# Altium PCB PCB_layout.PcbDoc
Units mm, origin at the board's own origin, x right, y up, seen from the top; angles counter-clockwise.
Board outline 55 x 40 mm, 2 copper layers (Top Layer, Bottom Layer); 84 components, 11 nets, 184 pads, 16 vias.
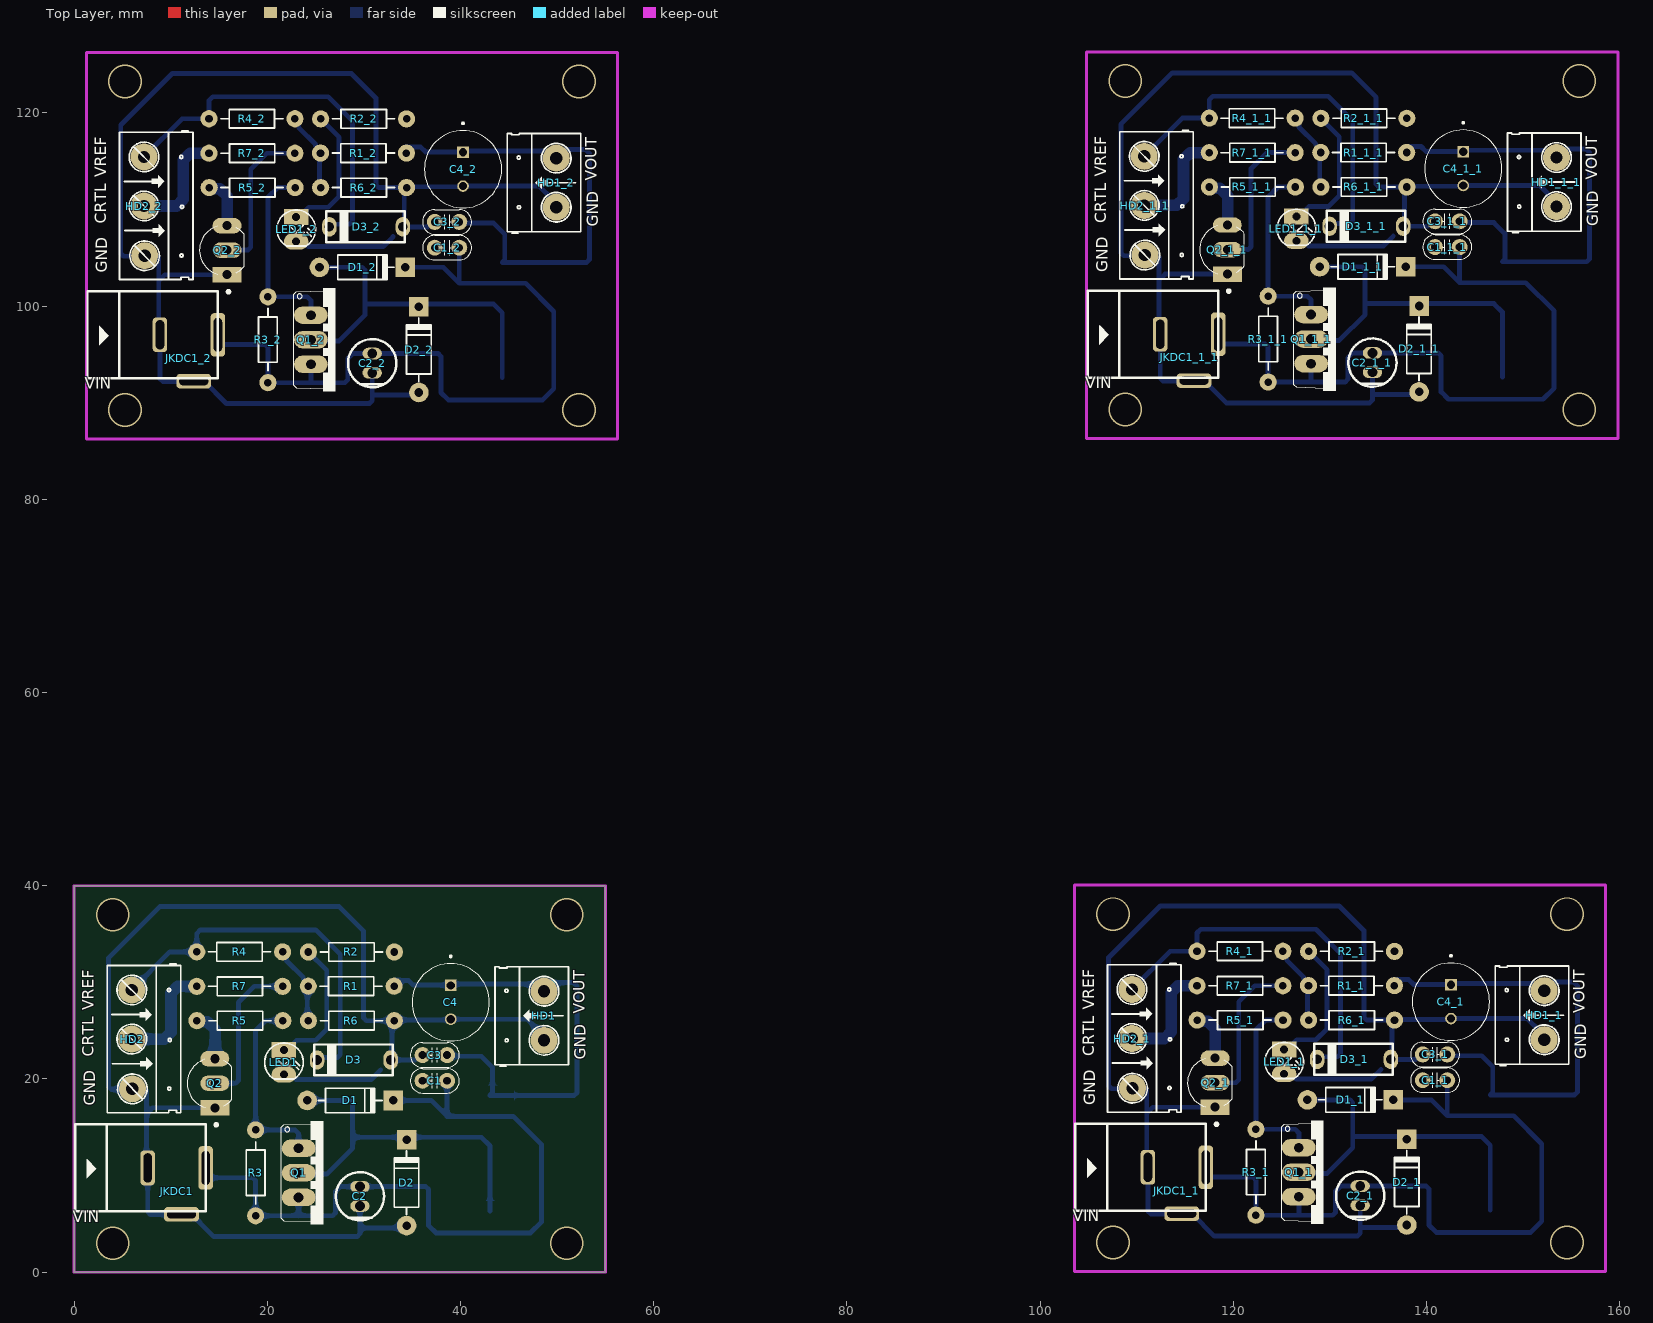
[diagram p0: Top Layer view]
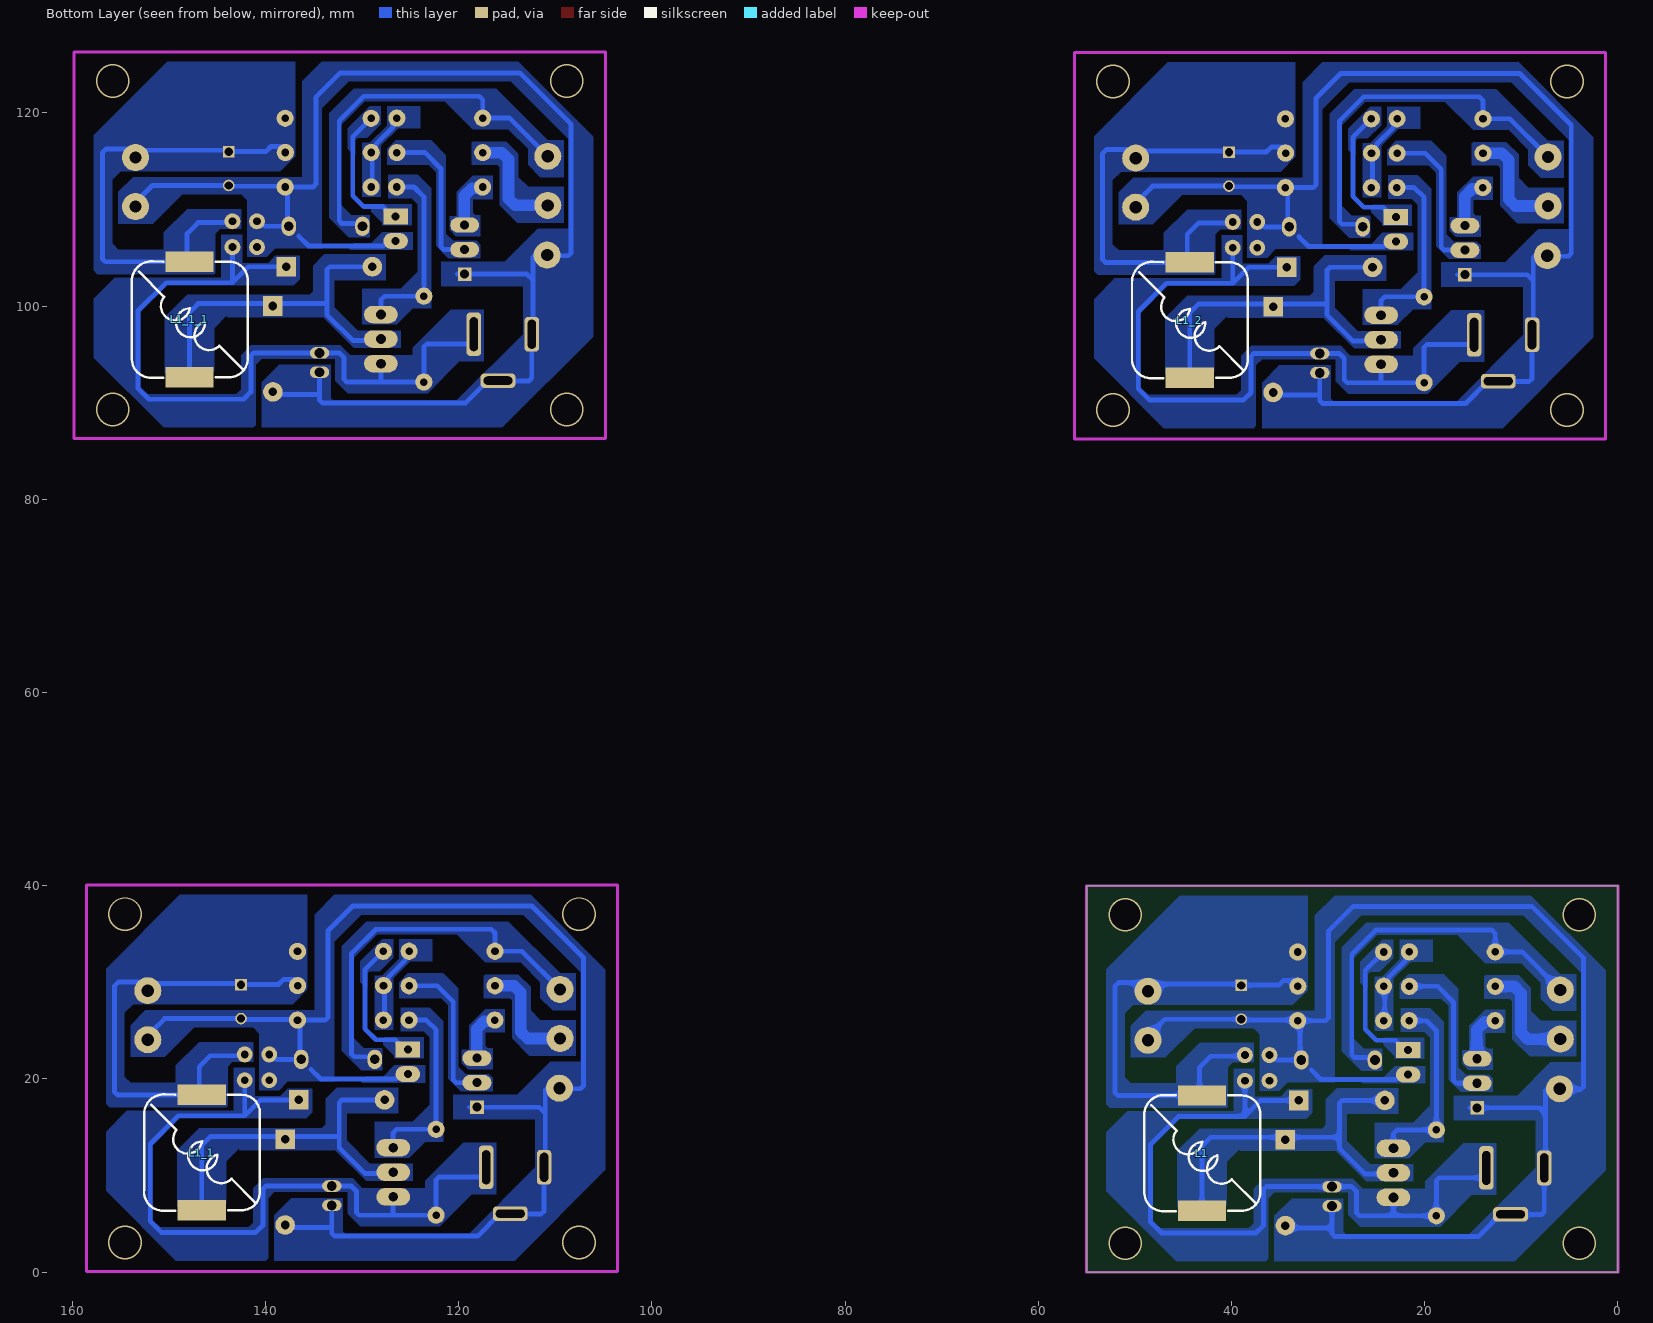
[diagram p1: Bottom Layer view, seen from below]

## Layer stack, top to bottom
Top Solder: solder mask 0.0102, Solder Resist, Dk 3.5
Top Layer: signal copper 0.0356
Dielectric 1: dielectric 0.32, FR-4, Dk 4.8
Bottom Layer: signal copper 0.0356
Bottom Solder: solder mask 0.0102, Solder Resist, Dk 3.5

## Board outline
0,0 55,0 55,40 0,40

## Design rules (kind name [scope] priority, off if disabled: settings)
Clearance [All] p1: gap=0.254 ignorepadtopadclearanceinfootprint=TRUE except(0: Arc-Hole Track-Hole SMDPad-Hole THPad-Hole Via-Hole Fill-Hole Poly-Hole Region-Hole Text-Hole)
HoleSize [All] p1: absolutevalues=TRUE maxlimit=1000 minlimit=0.3 maxpercent=80.000 minpercent=20.000
HoleToHoleClearance [All] p1 off: gap=0.254 allowstackedmicrovias=TRUE
PlaneClearance [All] p1: clearance=5
PolygonConnect [All] p1: connectstyle=Direct reliefconductorwidth=0.5 reliefentries=4 polygonreliefangle="90 Angle" airgapwidth=0.5
RoutingVias [All] p1: holewidth=0.4 width=0.6 viastyle="Through Hole" minholewidth=0.4 minwidth=0.6 maxholewidth=1000 maxwidth=1000
SilkToSilkClearance [All] p1 off: silktosilkclearance=0.254
SilkToSolderMaskClearance [IsPad] p1 off: minsilkscreentomaskgap=0.254 clearancetoexposedcopper=TRUE
SolderMaskExpansion [All] p1: expansion=0.102 istentingtop=FALSE
Width [All] p1: maxlimit=1000 minlimit=0.4 preferedwidth=0.5
25 further rules are at their usual default settings.

## Classes and differential pairs
component class schematic: C1 C2 C3 C4 D1 D2 D3 HD1 HD2 JKDC1 L1 LED1 Q1 Q2 R1 R3 R6 R7

## Components (designator, comment, footprint, x,y, rotation, side; value= is the part's Value field where it differs from the comment)
C1 "104" CAP_NP_100 37.338,19.812 r0 top
C1_1 "104" CAP_NP_100 140.87,19.874 r0 top (schematic designator C1)
C1_1_1 "104" CAP_NP_100 142.14,106.107 r0 top (schematic designator C1)
C1_2 "104" CAP_NP_100 38.608,106.045 r0 top (schematic designator C1)
C2 "470uF" "CAP_100uF_16V - duplicate" 29.591,8.858 r270 top
C2_1 "470uF" "CAP_100uF_16V - duplicate" 133.123,8.92 r270 top (schematic designator C2)
C2_1_1 "470uF" "CAP_100uF_16V - duplicate" 134.393,95.153 r270 top (schematic designator C2)
C2_2 "470uF" "CAP_100uF_16V - duplicate" 30.861,95.091 r270 top (schematic designator C2)
C3 "104" CAP_NP_100 37.338,22.479 r0 top
C3_1 "104" CAP_NP_100 140.87,22.541 r0 top (schematic designator C3)
C3_1_1 "104" CAP_NP_100 142.14,108.774 r0 top (schematic designator C3)
C3_2 "104" CAP_NP_100 38.608,108.712 r0 top (schematic designator C3)
C4 "22uF" CAPPRD350W60D800H1150 38.989,27.94 r270 top
C4_1 "22uF" CAPPRD350W60D800H1150 142.521,28.002 r270 top (schematic designator C4)
C4_1_1 "22uF" CAPPRD350W60D800H1150 143.791,114.235 r270 top (schematic designator C4)
C4_2 "22uF" CAPPRD350W60D800H1150 40.259,114.173 r270 top (schematic designator C4)
D1 "MBRS340T3" D1A 24.13,17.78 r180 top value=1N4007
D1_1 "MBRS340T3" D1A 127.662,17.842 r180 top value=1N4007 (schematic designator D1)
D1_1_1 "MBRS340T3" D1A 128.932,104.075 r180 top value=1N4007 (schematic designator D1)
D1_2 "MBRS340T3" D1A 25.4,104.013 r180 top value=1N4007 (schematic designator D1)
D2 "MBRS340T3" D1A 34.417,4.826 r270 top value=1N4007
D2_1 "MBRS340T3" D1A 137.949,4.888 r270 top value=1N4007 (schematic designator D2)
D2_1_1 "MBRS340T3" D1A 139.219,91.121 r270 top value=1N4007 (schematic designator D2)
D2_2 "MBRS340T3" D1A 35.687,91.059 r270 top value=1N4007 (schematic designator D2)
D3 "Diode" Diode_zener 32.766,21.971 r180 top value=1N5007
D3_1 "Diode" Diode_zener 136.298,22.033 r180 top value=1N5007 (schematic designator D3)
D3_1_1 "Diode" Diode_zener 137.568,108.266 r180 top value=1N5007 (schematic designator D3)
D3_2 "Diode" Diode_zener 34.036,108.204 r180 top value=1N5007 (schematic designator D3)
HD1 "Header 2" HED2 48.641,24.003 r90 top
HD1_1 "Header 2" HED2 152.173,24.065 r90 top (schematic designator HD1)
HD1_1_1 "Header 2" HED2 153.443,110.298 r90 top (schematic designator HD1)
HD1_2 "Header 2" HED2 49.911,110.236 r90 top (schematic designator HD1)
HD2 "Header 3" HED3 5.969,29.21 r270 top
HD2_1 "Header 3" HED3 109.501,29.272 r270 top (schematic designator HD2)
HD2_1_1 "Header 3" HED3 110.771,115.505 r270 top (schematic designator HD2)
HD2_2 "Header 3" HED3 7.239,115.443 r270 top (schematic designator HD2)
JKDC1 "JACK DC PAD_2" Jack_DC 13.62,10.795 r0 top
JKDC1_1 "JACK DC PAD_2" Jack_DC 117.152,10.857 r0 top (schematic designator JKDC1)
JKDC1_1_1 "JACK DC PAD_2" Jack_DC 118.422,97.09 r0 top (schematic designator JKDC1)
JKDC1_2 "JACK DC PAD_2" Jack_DC 14.89,97.028 r0 top (schematic designator JKDC1)
L1 "56uH" L_SMD_33uH_4.2A 43.033,6.295 r90 bottom value="150 mH"
L1_1 "56uH" L_SMD_33uH_4.2A 146.565,6.356 r90 bottom value="150 mH" (schematic designator L1)
L1_1_1 "56uH" L_SMD_33uH_4.2A 147.835,92.589 r90 bottom value="150 mH" (schematic designator L1)
L1_2 "56uH" L_SMD_33uH_4.2A 44.303,92.528 r90 bottom value="150 mH" (schematic designator L1)
LED1 "LED" LED-3 21.717,22.987 r270 top value="LED 3 ly Single Colour"
LED1_1 "LED" LED-3 125.249,23.049 r270 top value="LED 3 ly Single Colour" (schematic designator LED1)
LED1_1_1 "LED" LED-3 126.519,109.282 r270 top value="LED 3 ly Single Colour" (schematic designator LED1)
LED1_2 "LED" LED-3 22.987,109.22 r270 top value="LED 3 ly Single Colour" (schematic designator LED1)
Q1 "IRF9Z34N" TO220V 25.781,10.287 r270 top
Q1_1 "IRF9Z34N" TO220V 129.313,10.349 r270 top (schematic designator Q1)
Q1_1_1 "IRF9Z34N" TO220V 130.583,96.582 r270 top (schematic designator Q1)
Q1_2 "IRF9Z34N" TO220V 27.051,96.52 r270 top (schematic designator Q1)
Q2 "2N3904TF" TO92254P520H877-3 13.716,19.558 r90 top
Q2_1 "2N3904TF" TO92254P520H877-3 117.248,19.62 r90 top (schematic designator Q2)
Q2_1_1 "2N3904TF" TO92254P520H877-3 118.518,105.853 r90 top (schematic designator Q2)
Q2_2 "2N3904TF" TO92254P520H877-3 14.986,105.791 r90 top (schematic designator Q2)
R1 "Res1" R1/4W 33.132,29.603 r180 top value=3.3K
R1_1 "Res1" R1/4W 136.664,29.665 r180 top value=3.3K (schematic designator R1)
R1_1_1 "Res1" R1/4W 137.934,115.898 r180 top value=3.3K (schematic designator R1)
R1_2 "Res1" R1/4W 34.402,115.836 r180 top value=3.3K (schematic designator R1)
R2 "Res1" R1/4W 24.257,33.147 r0 top value=1K
R2_1 "Res1" R1/4W 127.789,33.209 r0 top value=1K (schematic designator R2)
R2_1_1 "Res1" R1/4W 129.059,119.442 r0 top value=1K (schematic designator R2)
R2_2 "Res1" R1/4W 25.527,119.38 r0 top value=1K (schematic designator R2)
R3 "Res1" R1/4W 18.796,5.842 r90 top value=10K
R3_1 "Res1" R1/4W 122.328,5.904 r90 top value=10K (schematic designator R3)
R3_1_1 "Res1" R1/4W 123.598,92.137 r90 top value=10K (schematic designator R3)
R3_2 "Res1" R1/4W 20.066,92.075 r90 top value=10K (schematic designator R3)
R4 "Res1" R1/4W 21.59,33.159 r180 top value=100
R4_1 "Res1" R1/4W 125.122,33.221 r180 top value=100 (schematic designator R4)
R4_1_1 "Res1" R1/4W 126.392,119.454 r180 top value=100 (schematic designator R4)
R4_2 "Res1" R1/4W 22.86,119.392 r180 top value=100 (schematic designator R4)
R5 "Res1" R1/4W 12.715,26.035 r0 top value=10K
R5_1 "Res1" R1/4W 116.247,26.097 r0 top value=10K (schematic designator R5)
R5_1_1 "Res1" R1/4W 117.517,112.33 r0 top value=10K (schematic designator R5)
R5_2 "Res1" R1/4W 13.985,112.268 r0 top value=10K (schematic designator R5)
R6 "Res1" R1/4W 24.257,26.035 r0 top value=10K
R6_1 "Res1" R1/4W 127.789,26.097 r0 top value=10K (schematic designator R6)
R6_1_1 "Res1" R1/4W 129.059,112.33 r0 top value=10K (schematic designator R6)
R6_2 "Res1" R1/4W 25.527,112.268 r0 top value=10K (schematic designator R6)
R7 "Res1" R1/4W 12.7,29.591 r0 top value=1K
R7_1 "Res1" R1/4W 116.232,29.653 r0 top value=1K (schematic designator R7)
R7_1_1 "Res1" R1/4W 117.502,115.886 r0 top value=1K (schematic designator R7)
R7_2 "Res1" R1/4W 13.97,115.824 r0 top value=1K (schematic designator R7)

## Footprints (in the part's own frame and the unit in brackets; to place one, negate y for a bottom-side part, rotate by r counter-clockwise, add the part's x,y. Pads: shape width x height; smd on the part's side, far side on the other; paste and mask are expansions set on the pad)
"CAP_100uF_16V - duplicate" [mm]
  oval 1.2x2 hole 1.02: N(2,0) P(0,0)
  silkscreen extent -1.5,-2.5 3.5,2.5, body extent -1.48,-2.46 3.52,2.54, height 11
CAP_NP_100 [mil]
  round 65 hole 31.5: 1(-50,0) 2(50,0)
  silkscreen extent -100,-50 100,50, body extent -110,-30 120,37, height 235
CAPPRD350W60D800H1150 [mm]
  round 1.2 hole 0.85: N(1.75,0)
  rect 1.2x1.2 hole 0.85: P(-1.75,0)
  silkscreen extent -4.85,-4 4,4, body extent -4,-4 4,4, height 11.5
D1A [mil] "Diode 1A, W 100mil, L 350mil"
  round 80 hole 35: 1(0,0)
  rect 80x80 hole 35: 2(-350,0)
  silkscreen extent -305,-50 -45,50, body extent -386,-33 34,36, height 84
Diode_zener [mm]
  oval 1.5x2 hole 1: 1(0,0) 2(7.62,0)
  silkscreen extent -0.2,-1.6 7.92,1.63, body extent -0.22,-0.99 7.89,1.02, height 3
HED2 [mil] "Header 2, 2 pin, hight 300mil, Pin to Pin 200, Colour Green"
  round 110 hole 50: 1(0,0) 2(200,0)
  silkscreen extent -106,-100 300,200, body extent -92,-140 302,155, height 394
HED3 [mil] "Header 3, 3 pin, hight 300mil, Pin to Pin 200, Colour Green"
  round 110 hole 50: 1(0,0) 2(200,0) 3(402.62,2.62)
  silkscreen extent -106,-100 500,200, body extent -95,-138 495,157, height 394
Jack_DC [mm]
  rrect50% 1.5x4.5 hole 0.85 slot 3.5 at 90 deg: 1(0,0)
  rrect50% 1.5x3.6 hole 0.85 slot 3 at 90 deg: 2(-6,0)
  rrect50% 3.6x1.5 hole 0.85 slot 3 at 0 deg: 2(-2.5,-4.8)
  silkscreen extent -13.5,-4.5 0,4.5, body extent -13.63,-4.9 0.57,4.64, height 11
L_SMD_33uH_4.2A [mm]
  rect 2.1x5 smd: 1(0.055,0.02) 2(12,0.02)
  silkscreen extent 0,-6 12.04,6, body extent 0.03,-6.01 12.03,5.99, height 7.42
LED-3 [mil] "LED 2 PIN, 3ly Only colour"
  rect 65x100 hole 32: 1(0,0)
  oval 65x100 hole 32: 2(100,0)
  silkscreen extent -29,-78 118,79, body extent -25,-75 113,75, height 217
R1/4W [mil] "R 1/4W, 2 Pin, 350mil"
  round 70 hole 31: 1(0,0) 2(350,0)
  silkscreen extent 48,-38 302,38, body extent -40,-47 386,47, height 111
TO220V [mm]
  oval 1.8x3.5 hole 1.016 mask+0.102: 1(-2.54,-2.54) 2(0,-2.54) 3(2.54,-2.54)
  silkscreen extent -5.33,-4.32 5.33,0, body extent -5.21,-4.38 5.21,0.06, height 19.3
TO92254P520H877-3 [mm]
  rect 1.6x3 / inner round 1.41 / far side rect 1.41x1.41 hole 0.94: 1(-2.54,-0.853)
  oval 1.6x3 hole 0.94: 2(0,-0.853) 3(2.54,-0.853)
  silkscreen extent -4.44,-2.62 2.47,2.01, body extent -2.83,-2.48 2.83,1.14, height 8.77

## Part data
C1 C1_1 C1_1_1 C1_2 C3 C3_1 C3_1_1 C3_2: library part "Cap Semi", "Capacitor (Semiconductor SIM Model)", LatestRevisionDate=17-Jul-2002, LatestRevisionNote="Re-released for DXP Platform.", PackageReference=C1206, Publisher="Altium Limited"
C2 C2_1 C2_1_1 C2_2: library part Cap_22uF_16V_pad, "Polarized Capacitor 35V", Manufacturer=FARNELL, AEMS Code=2100110, ComponentLink1Description="Digikey Part Link", ComponentLink2Description="Open Datasheet", ComponentLink2URL=H:\LIBRARY\LIBRARY.Datasheet\, Published=13-April-2009, Publisher="Hoang Nguyen", Vendor=Digikey
C4 C4_1 C4_1_1 C4_2: library part Cap_8x12_pad_1, "Polarized Capacitor 35V", Manufacturer=FARNELL, AEMS Code=2100110, ComponentLink1Description="Digikey Part Link", ComponentLink2Description="Open Datasheet", ComponentLink2URL=H:\LIBRARY\LIBRARY.Datasheet\, Published=13-April-2009, Publisher="Hoang Nguyen", Vendor=Digikey
D1 D1_1 D1_1_1 D1_2 D2 D2_1 D2_1_1 D2_2: library part D1A, "Diode 1A"
D3 D3_1 D3_1_1 D3_2: library part "Diode zenner 5V", "Default Diode", Code - JEDEC=DO-214-AB, Published=8-Jun-2000, Publisher="Altium Limited", Revision="July-2002: Re-released for DXP Platform."
HD1 HD1_1 HD1_1_1 HD1_2: library part Header_green_2pin, "Header 2 (Green)"
HD2 HD2_1 HD2_1_1 HD2_2: library part Header_green_3pin, "Header 3 (Green)"
L1 L1_1 L1_1_1 L1_2: library part L_33uH_smd_1, "inductor 33uH 4.2A"
LED1 LED1_1 LED1_1_1 LED1_2: "LED Single colour Green and Red"
Q1 Q1_1 Q1_1_1 Q1_2: "P-Channel 55V 19A (Tc) 3.8W (Ta), 68W (Tc) Surface Mount D2PAK", Package="TO-220 Infineon", Check_prices=https://www.snapeda.com/parts/IRF9Z34N/Infineon/view-part/?ref=eda, MF="Infineon Technologies", MP=IRF9Z34N, SnapEDA_Link=https://www.snapeda.com/parts/IRF9Z34N/Infineon/view-part/?ref=snap
Q2 Q2_1 Q2_1_1 Q2_2: "Transistor General Purpose BJT NPN 40 Volt 0.2 Amp 3-Pin TO-92 Tape And Reel", Package="TO-92-3 ON Semiconductor", Check_prices=https://www.snapeda.com/parts/2N3904TF/Fairchild+Imaging/view-part/?ref=eda, MF="Fairchild Semiconductor", MP=2N3904TF, SnapEDA_Link=https://www.snapeda.com/parts/2N3904TF/Fairchild+Imaging/view-part/?ref=snap
R1 R1_1 R1_1_1 R1_2 R2 R2_1 R2_1_1 R2_2 R3 R3_1 R3_1_1 R3_2 R4 R4_1 R4_1_1 R4_2 R5 R5_1 R5_1_1 R5_2 R6 R6_1 R6_1_1 R6_2 R7 R7_1 R7_1_1 R7_2: library part Res1_4, "Resistor", Manufacturer="Generic Components", Class=Passive, Published=08/06/2000, Publisher="Altium Hobart Technology Centre", SubClass=Resistor

## Via types
v1: diameter 3.5, hole 3.2, Top Layer to Bottom Layer, 16 vias

## Nets (pads, with @x,y where several pads share a name; then routed paths per layer and width w, separated by ;. In a path a pad name is that pad's centre, name@x,y a point inside that pad or via, vN(x,y) a via of type N, cw(c..) or ccw(c..) an arc to the next point about the centre after c; other vN are vias at no path point)
CTRL: HD2.2 R7.1 | length 11.4
  Bottom Layer w1.2: HD2.2 9.33,24.13 10.033,24.833 10.033,28.888 10.736,29.591 R7.1
GND: C1.1 C2.N C3.1 C4.N D2.1 D3.1 HD1.1 HD2.3 JKDC1.2 LED1.2 Q2.1 R6.2 | length 145.5
  Bottom Layer w0.5: 15.331,17.018 8.128,17.018 7.493,16.383 ; LED1.2 22.473,20.447 22.981,19.939 30.734,19.939 31.75,20.955 ; C2.N 29.591,4.572 ; D2.1@34.414,4.572 29.591,4.572 ; C3.1@36.068,22.733 35.306,21.971 D3.1 32.901,22.106 32.901,25.9 R6.2@33.035,26.035 ; HD1.1@48.641,24.892 48.201,24.892 46.903,26.19 C4.N 38.911,26.113 33.113,26.113 R6.2@33.035,26.035 ; 7.493,16.383 7.493,18.796 7.366,18.923 6.036,18.923 3.849,18.923 3.556,19.216 3.556,32.512 8.89,37.846 27.432,37.846 29.972,35.306 29.972,26.328 30.265,26.035 R6.2@33.035,26.035 ; 7.493,16.383 7.493,9.906 7.62,9.779 7.62,6.262 7.913,5.969 12.192,5.969 14.478,3.683 29.298,3.683 29.591,3.976 29.591,4.572
NetC1_2: C1.2 C2.P D1.2 JKDC1.1 Q1.3 R3.1 | length 76.6
  Bottom Layer w0.5: JKDC1.1@13.62,9.779 18.503,9.779 18.796,9.486 R3.1 23.241,5.842 ; Q1.3 23.241,5.842 ; D1.2 36.957,17.78 38.608,16.129 ; C1.2 38.608,16.129 ; 23.241,5.842 26.758,5.842 27.051,6.135 27.051,8.343 27.566,8.858 C2.P 36.41,8.858 36.703,8.565 36.703,4.826 37.465,4.064 47.244,4.064 48.387,5.207 48.387,13.208 45.466,16.129 38.608,16.129
NetD1_1: D1.1 D2.2 L1.1 Q1.2 | length 37.5
  Bottom Layer w0.5: Q1.2 23.368,10.16 26.162,10.16 28.829,12.827 28.829,13.97 ; D1.1 28.536,17.78 28.829,17.487 28.829,13.97 ; L1.1 43.053,13.081 42.164,13.97 34.925,13.97 28.829,13.97
NetLED1_1: LED1.1 R2.1 | length 14.2
  Bottom Layer w0.5: LED1.1 22.162,22.987 22.737,23.563 22.737,23.71 23.03,24.003 25.019,24.003 26.162,25.146 26.162,31.242 R2.1
NetQ1_1: Q1.1 R3.2 R5.2 | length 19.6
  Bottom Layer w0.5: R5.2 19.812,26.035 18.796,25.019 R3.2 19.041,14.732 22.86,14.732 23.241,14.351 Q1.1
NetQ2_2: Q2.2 R7.2 | length 15.2
  Bottom Layer w0.5: Q2.2@15.331,19.558 16.725,19.558 17.018,19.851 17.018,27.94 18.669,29.591 R7.2
NetQ2_3: Q2.3 R5.1 | length 5.3
  Bottom Layer w1.2: R5.1 12.826,25.924 13.797,25.924 14.605,25.116 14.605,22.283 14.569,22.246 Q2.3
NetR1_2: R1.2 R4.1 R6.1 | length 8.2
  Bottom Layer w0.5: R4.1 21.59,32.814 21.989,32.415 21.989,32.24 23.719,30.51 23.719,30.36 24.13,29.949 R1.2@24.13,29.603 ; R1.2@24.138,29.603 24.138,26.043 R6.1@24.145,26.035
V_REF: D3.2 HD2.1 R4.2 | length 39.3
  Bottom Layer w0.5: HD2.1 9.918,33.159 R4.2 12.7,35.052 13.081,35.433 25.019,35.433 27.559,32.893 27.559,22.531 27.266,22.238 25.413,22.238 D3.2
VOUT: C3.2 C4.P HD1.2 L1.2 R1.1 R2.2 | length 47.9
  Bottom Layer w0.5: R1.1@33.02,30.226 34.613,30.226 35.121,29.718 38.961,29.718 C4.P 39.13,29.831 48.5,29.831 48.641,29.972 51.689,29.972 52.07,29.591 52.07,18.588 51.777,18.295 L1.2 43.307,18.549 43.307,21.209 42.164,22.352 C3.2@38.613,22.352
pads on no net: C1_1.1 C1_1.2 C1_1_1.1 C1_1_1.2 C1_2.1 C1_2.2 C2_1.N C2_1.P C2_1_1.N C2_1_1.P C2_2.N C2_2.P C3_1.1 C3_1.2 C3_1_1.1 C3_1_1.2 C3_2.1 C3_2.2 C4_1.N C4_1.P C4_1_1.N C4_1_1.P C4_2.N C4_2.P D1_1.1 D1_1.2 D1_1_1.1 D1_1_1.2 D1_2.1 D1_2.2 D2_1.1 D2_1.2 D2_1_1.1 D2_1_1.2 D2_2.1 D2_2.2 D3_1.1 D3_1.2 D3_1_1.1 D3_1_1.2 D3_2.1 D3_2.2 HD1_1.1 HD1_1.2 HD1_1_1.1 HD1_1_1.2 HD1_2.1 HD1_2.2 HD2_1.1 HD2_1.2 HD2_1.3 HD2_1_1.1 HD2_1_1.2 HD2_1_1.3 HD2_2.1 HD2_2.2 HD2_2.3 JKDC1_1.1 JKDC1_1.2 JKDC1_1_1.1 JKDC1_1_1.2 JKDC1_2.1 JKDC1_2.2 L1_1.1 L1_1.2 L1_1_1.1 L1_1_1.2 L1_2.1 L1_2.2 LED1_1.1 LED1_1.2 LED1_1_1.1 LED1_1_1.2 LED1_2.1 LED1_2.2 Q1_1.1 Q1_1.2 Q1_1.3 Q1_1_1.1 Q1_1_1.2 Q1_1_1.3 Q1_2.1 Q1_2.2 Q1_2.3 Q2_1.1 Q2_1.2 Q2_1.3 Q2_1_1.1 Q2_1_1.2 Q2_1_1.3 Q2_2.1 Q2_2.2 Q2_2.3 R1_1.1 R1_1.2 R1_1_1.1 R1_1_1.2 R1_2.1 R1_2.2 R2_1.1 R2_1.2 R2_1_1.1 R2_1_1.2 R2_2.1 R2_2.2 R3_1.1 R3_1.2 R3_1_1.1 R3_1_1.2 R3_2.1 R3_2.2 R4_1.1 R4_1.2 R4_1_1.1 R4_1_1.2 R4_2.1 R4_2.2 R5_1.1 R5_1.2 R5_1_1.1 R5_1_1.2 R5_2.1 R5_2.2 R6_1.1 R6_1.2 R6_1_1.1 R6_1_1.2 R6_2.1 R6_2.2 R7_1.1 R7_1.2 R7_1_1.1 R7_1_1.2 R7_2.1 R7_2.2
copper on no net: | length 1262
  Bottom Layer w0.5: 7.239,115.443 11.188,119.392 13.97,119.392 13.97,121.285 14.351,121.666 26.289,121.666 28.829,119.126 28.829,108.764 28.536,108.471 26.683,108.471 26.416,108.204 ; 14.89,96.012 19.773,96.012 20.066,95.719 20.066,92.075 24.511,92.075 ; 16.601,103.251 9.398,103.251 8.763,102.616 ; 16.601,105.791 17.995,105.791 18.288,106.084 18.288,114.173 19.939,115.824 22.86,115.824 ; 22.86,119.392 22.86,119.047 23.259,118.648 23.259,118.473 24.989,116.743 24.989,116.593 25.4,116.182 25.4,115.836 ; 22.875,112.268 21.082,112.268 20.066,111.252 20.066,100.965 20.311,100.965 24.13,100.965 24.511,100.584 24.511,99.06 ; 22.987,106.68 23.743,106.68 24.251,106.172 32.004,106.172 33.02,107.188 ; 22.987,109.22 23.431,109.22 24.007,109.796 24.007,109.943 24.3,110.236 26.289,110.236 27.432,111.379 27.432,117.475 25.527,119.38 ; 24.511,93.98 24.511,92.075 ; 24.511,96.52 24.638,96.393 27.432,96.393 30.099,99.06 30.099,100.203 ; 25.4,104.013 29.806,104.013 30.099,103.72 30.099,100.203 ; 25.408,115.836 25.408,112.276 25.415,112.268 ; 30.861,93.091 30.861,90.805 ; 34.29,104.013 38.227,104.013 39.878,102.362 ; 34.29,116.459 35.883,116.459 36.391,115.951 40.231,115.951 40.259,115.923 40.4,116.064 49.77,116.064 49.911,116.205 52.959,116.205 53.34,115.824 53.34,104.821 53.047,104.528 44.323,104.528 44.577,104.782 44.577,107.442 43.434,108.585 39.883,108.585 ; 35.684,90.805 30.861,90.805 ; 37.338,108.966 36.576,108.204 34.036,108.204 34.171,108.339 34.171,112.133 34.305,112.268 ; 39.878,106.045 39.878,102.362 ; 44.323,92.583 44.323,99.314 43.434,100.203 36.195,100.203 30.099,100.203 ; 49.911,111.125 49.471,111.125 48.173,112.423 40.259,112.423 40.181,112.346 34.383,112.346 34.305,112.268 ; 109.501,29.272 113.45,33.221 116.232,33.221 116.232,35.114 116.613,35.495 128.551,35.495 131.091,32.955 131.091,22.593 130.798,22.3 128.945,22.3 128.678,22.033 ; 110.771,115.505 114.72,119.454 117.502,119.454 117.502,121.347 117.883,121.728 129.821,121.728 132.361,119.188 132.361,108.826 132.068,108.533 130.215,108.533 129.948,108.266 ; 117.152,9.841 122.035,9.841 122.328,9.548 122.328,5.904 126.773,5.904 ; 118.422,96.074 123.305,96.074 123.598,95.781 123.598,92.137 128.043,92.137 ; 118.862,17.08 111.66,17.08 111.025,16.445 ; 118.862,19.62 120.257,19.62 120.55,19.912 120.55,28.002 122.201,29.653 125.122,29.653 ; 120.132,103.313 112.93,103.313 112.295,102.678 ; 120.132,105.853 121.527,105.853 121.82,106.145 121.82,114.235 123.471,115.886 126.392,115.886 ; 125.122,33.221 125.122,32.875 125.521,32.476 125.521,32.302 127.251,30.572 127.251,30.422 127.662,30.011 127.662,29.665 ; 125.137,26.097 123.344,26.097 122.328,25.081 122.328,14.794 122.572,14.794 126.392,14.794 126.773,14.413 126.773,12.889 ; 125.249,20.509 126.005,20.509 126.513,20.001 134.266,20.001 135.282,21.017 ; 125.249,23.049 125.693,23.049 126.269,23.624 126.269,23.772 126.562,24.065 128.551,24.065 129.694,25.208 129.694,31.304 127.789,33.209 ; 126.392,119.454 126.392,119.108 126.791,118.709 126.791,118.535 128.521,116.805 128.521,116.655 128.932,116.244 128.932,115.898 ; 126.407,112.33 124.614,112.33 123.598,111.314 123.598,101.027 123.842,101.027 127.662,101.027 128.043,100.646 128.043,99.122 ; 126.519,106.742 127.275,106.742 127.783,106.234 135.536,106.234 136.552,107.25 ; 126.519,109.282 126.963,109.282 127.539,109.857 127.539,110.005 127.832,110.298 129.821,110.298 130.964,111.441 130.964,117.537 129.059,119.442 ; 126.773,7.809 126.773,5.904 ; 126.773,10.349 126.9,10.222 129.694,10.222 132.361,12.889 132.361,14.032 ; 127.662,17.842 132.068,17.842 132.361,17.549 132.361,14.032 ; 127.67,29.665 127.67,26.104 127.677,26.097 ; 128.043,94.042 128.043,92.137 ; 128.043,96.582 128.17,96.455 130.964,96.455 133.631,99.122 133.631,100.265 ; 128.932,104.075 133.338,104.075 133.631,103.782 133.631,100.265 ; 128.94,115.898 128.94,112.337 128.947,112.33 ; 133.123,6.92 133.123,4.634 ; 134.393,93.153 134.393,90.867 ; 136.552,17.842 140.489,17.842 142.14,16.191 ; 136.552,30.288 138.145,30.288 138.653,29.78 142.493,29.78 142.521,29.752 142.662,29.893 152.032,29.893 152.173,30.034 155.221,30.034 155.602,29.653 155.602,18.649 155.309,18.356 146.585,18.356 146.839,18.61 146.839,21.271 145.696,22.414 142.145,22.414 ; 137.822,104.075 141.759,104.075 143.41,102.424 ; 137.822,116.521 139.415,116.521 139.923,116.013 143.763,116.013 143.791,115.985 143.932,116.126 153.302,116.126 153.443,116.267 156.491,116.267 156.872,115.886 156.872,104.882 156.579,104.589 147.855,104.589 148.109,104.843 148.109,107.504 146.966,108.647 143.415,108.647 ; 137.946,4.634 133.123,4.634 ; 139.216,90.867 134.393,90.867 ; 139.6,22.795 138.838,22.033 136.298,22.033 136.433,22.167 136.433,25.962 136.567,26.097 ; 140.87,109.028 140.108,108.266 137.568,108.266 137.703,108.4 137.703,112.195 137.837,112.33 ; 142.14,19.874 142.14,16.191 ; 143.41,106.107 143.41,102.424 ; 146.585,6.412 146.585,13.143 145.696,14.032 138.457,14.032 132.361,14.032 ; 147.855,92.645 147.855,99.376 146.966,100.265 139.727,100.265 133.631,100.265 ; 152.173,24.954 151.733,24.954 150.435,26.252 142.521,26.252 142.443,26.174 136.645,26.174 136.567,26.097 ; 153.443,111.187 153.003,111.187 151.705,112.485 143.791,112.485 143.713,112.407 137.915,112.407 137.837,112.33 ; 8.763,102.616 8.763,96.139 8.89,96.012 8.89,92.495 9.183,92.202 13.462,92.202 15.748,89.916 30.568,89.916 30.861,90.209 30.861,90.805 ; 8.763,102.616 8.763,105.029 8.636,105.156 7.306,105.156 5.119,105.156 4.826,105.449 4.826,118.745 10.16,124.079 28.702,124.079 31.242,121.539 31.242,112.561 31.535,112.268 34.305,112.268 ; 24.511,92.075 28.028,92.075 28.321,92.368 28.321,94.576 28.836,95.091 30.861,95.091 37.68,95.091 37.973,94.798 37.973,91.059 38.735,90.297 48.514,90.297 49.657,91.44 49.657,99.441 46.736,102.362 39.878,102.362 ; 111.025,16.445 111.025,9.968 111.152,9.841 111.152,6.323 111.445,6.031 115.724,6.031 118.01,3.745 132.83,3.745 133.123,4.037 133.123,4.634 ; 111.025,16.445 111.025,18.858 110.898,18.985 109.567,18.985 107.381,18.985 107.088,19.277 107.088,32.574 112.422,37.908 130.964,37.908 133.504,35.368 133.504,26.389 133.797,26.097 136.567,26.097 ; 112.295,102.678 112.295,105.091 112.168,105.218 110.837,105.218 108.651,105.218 108.358,105.51 108.358,118.807 113.692,124.141 132.234,124.141 134.774,121.601 134.774,112.622 135.067,112.33 137.837,112.33 ; 112.295,102.678 112.295,96.201 112.422,96.074 112.422,92.556 112.715,92.264 116.994,92.264 119.28,89.978 134.1,89.978 134.393,90.27 134.393,90.867 ; 126.773,5.904 130.29,5.904 130.583,6.196 130.583,8.405 131.098,8.92 133.123,8.92 139.942,8.92 140.235,8.627 140.235,4.888 140.997,4.126 150.776,4.126 151.919,5.269 151.919,13.27 148.998,16.191 142.14,16.191 ; 128.043,92.137 131.56,92.137 131.853,92.429 131.853,94.638 132.368,95.153 134.393,95.153 141.212,95.153 141.505,94.86 141.505,91.121 142.267,90.359 152.046,90.359 153.189,91.502 153.189,99.503 150.268,102.424 143.41,102.424
  Bottom Layer w1.2: 7.239,110.363 10.6,110.363 11.303,111.066 11.303,115.121 12.006,115.824 13.97,115.824 ; 13.985,112.268 14.096,112.157 15.067,112.157 15.875,111.349 15.875,108.516 15.839,108.479 15.839,108.331 ; 109.501,24.192 112.862,24.192 113.565,24.894 113.565,28.95 114.268,29.653 116.232,29.653 ; 110.771,110.425 114.132,110.425 114.835,111.127 114.835,115.183 115.538,115.886 117.502,115.886 ; 116.247,26.097 116.358,25.986 117.329,25.986 118.137,25.178 118.137,22.344 118.1,22.308 118.1,22.16 ; 117.517,112.33 117.628,112.219 118.599,112.219 119.407,111.411 119.407,108.577 119.37,108.541 119.37,108.393
  other v1: 4,3 51,3 107.532,3.062 154.532,3.062 4,37 51,37 107.532,37.062 154.532,37.062 5.27,89.233 52.27,89.233 108.802,89.295 155.802,89.295 5.27,123.233 52.27,123.233 108.802,123.295 155.802,123.295

## Polygon pours and split planes (outlines as drawn)
no net on Bottom Layer "NONET_L-01_P-001" (solid, remove dead copper, pour order 90): 128.043,120.712 128.043,118.807 129.44,117.41 130.456,117.41 130.71,117.156 130.71,115.505 131.472,116.267 131.472,118.426 129.186,120.712
no net on Bottom Layer "NONET_L-01_P-001" (solid, remove dead copper, pour order 89): 109.12,112.33 109.12,108.647 113.946,108.647 115.724,110.425 115.724,114.362 115.978,114.616 118.645,114.616 118.645,116.902 118.518,117.029 115.089,117.029 113.819,115.759 113.819,113.346 112.803,112.33
no net on Bottom Layer "NONET_L-01_P-001" (solid, remove dead copper, pour order 88): 116.486,113.473 118.518,113.473 120.169,111.822 120.169,109.282 120.931,109.282 120.931,107.885 120.296,107.25 117.756,107.25 117.756,109.282 117.756,109.409 118.264,109.409 118.518,109.663 118.518,111.06 116.486,111.06
no net on Bottom Layer "NONET_L-01_P-001" (solid, remove dead copper, pour order 87): 124.868,110.552 128.932,110.552 129.186,110.298 129.188,110.298 129.188,110.173 129.059,110.044 129.059,109.79 127.916,108.647 127.916,108.393 124.868,108.393
no net on Bottom Layer "NONET_L-01_P-001" (solid, remove dead copper, pour order 86): 124.741,107.631 127.916,107.631 129.059,106.488 130.837,106.488 131.345,105.98 131.218,105.853 124.741,105.853
no net on Bottom Layer "NONET_L-01_P-001" (solid, remove dead copper, pour order 85): 126.519,117.156 127.408,116.267 127.408,114.616 123.09,114.616 122.328,113.854 122.328,106.234 121.058,104.964 117.756,104.964 117.756,106.361 118.137,106.742 120.55,106.742 121.312,107.504 121.312,115.632 122.836,117.156
no net on Bottom Layer "NONET_L-01_P-001" (solid, remove dead copper, pour order 84): 127.281,113.6 124.233,113.6 122.836,112.203 122.836,99.757 124.741,99.757 126.392,98.106 129.948,98.106 129.948,101.789 126.011,101.789 124.233,103.567 124.233,110.552 124.868,111.187 127.281,111.187
no net on Bottom Layer "NONET_L-01_P-001" (solid, remove dead copper, pour order 83): 123.979,120.712 127.408,120.712 127.408,118.68 129.186,116.902 129.948,116.902 129.948,111.314 128.043,111.314 128.043,116.648 126.265,118.426 123.979,118.426
no net on Bottom Layer "NONET_L-01_P-001" (solid, remove dead copper, pour order 82): 109.12,113.346 111.533,113.346 112.803,114.616 112.803,116.267 114.835,118.299 118.518,118.299 121.439,121.22 129.694,121.22 132.488,118.426 132.488,110.806 131.091,109.409 129.186,109.409 129.186,107.123 131.345,107.123 133.377,109.155 133.377,119.95 130.837,122.49 116.105,122.49 110.771,117.156 109.12,117.156
no net on Bottom Layer "NONET_L-01_P-001" (solid, remove dead copper, pour order 81): 144.489,102.932 155.602,102.932 157.761,100.773 157.761,94.677 150.522,87.438 141.251,87.438 140.997,87.692 140.997,90.867 152.173,90.867 152.935,91.629 152.935,99.376 150.141,102.17 144.299,102.17
no net on Bottom Layer "NONET_L-01_P-001" (solid, remove dead copper, pour order 80): 155.221,108.52 155.221,111.822 153.697,113.346 137.187,113.346 136.171,113.346 136.171,123.252 134.139,125.284 113.819,125.284 106.072,117.537 106.072,102.805 106.072,96.836 115.47,87.438 140.362,87.438 140.362,92.137 138.584,93.915 133.25,93.915 133.25,90.486 132.996,90.232 120.169,90.232 113.311,97.09 113.311,102.043 121.82,102.043 121.82,104.583 115.216,104.583 111.787,108.012 108.612,108.012 108.612,117.283 114.581,123.252 131.345,123.252 134.139,120.458 134.139,105.98 138.965,105.98 139.854,105.091 141.886,105.091 141.886,110.933 142.521,111.568 148.617,111.568 151.665,108.52
no net on Bottom Layer "NONET_L-01_P-001" (solid, remove dead copper, pour order 79): 136.933,125.284 150.141,125.284 157.761,117.664 157.761,103.694 157.38,103.313 145.315,103.313 145.188,103.44 145.188,107.504 144.68,108.012 142.521,108.012 142.521,110.044 148.109,110.044 150.522,107.631 150.522,105.853 155.221,105.853 155.856,106.488 155.856,113.092 154.967,113.981 138.457,113.981 136.933,115.505
no net on Bottom Layer "NONET_L-01_P-001" (solid, remove dead copper, pour order 78): 142.394,107.377 144.553,107.377 144.553,102.17 137.06,102.17 136.425,102.805 136.425,105.218 138.965,105.218 139.727,104.456 142.394,104.456
no net on Bottom Layer "NONET_L-01_P-001" (solid, remove dead copper, pour order 77): 126.011,97.471 130.456,97.471 132.869,99.884 132.869,102.678 127.535,102.678 127.535,105.345 133.885,105.345 135.028,104.202 135.028,101.535 135.409,101.154 148.109,101.154 150.395,98.868 150.395,93.026 145.569,93.026 145.315,93.28 145.315,97.725 144.045,98.995 143.918,98.868 134.012,98.868 130.837,95.693 126.011,95.693
no net on Bottom Layer "NONET_L-01_P-001" (solid, remove dead copper, pour order 76): 117.375,99.63 119.153,99.63 120.804,99.63 124.741,95.693 124.741,94.931 131.218,94.931 132.234,95.947 141.505,95.947 142.521,94.931 142.521,91.375 143.283,90.613 143.283,90.105 141.505,90.105 140.997,90.613 140.997,93.915 140.362,94.55 132.742,94.55 132.742,92.264 131.472,90.994 123.217,90.994 119.915,94.296 117.375,94.296
no net on Bottom Layer "NONET_L-01_P-001" (solid, remove dead copper, pour order 75): 24.511,120.65 24.511,118.745 25.908,117.348 26.924,117.348 27.178,117.094 27.178,115.443 27.94,116.205 27.94,118.364 25.654,120.65
no net on Bottom Layer "NONET_L-01_P-001" (solid, remove dead copper, pour order 74): 5.588,112.268 5.588,108.585 10.414,108.585 12.192,110.363 12.192,114.3 12.446,114.554 15.113,114.554 15.113,116.84 14.986,116.967 11.557,116.967 10.287,115.697 10.287,113.284 9.271,112.268
no net on Bottom Layer "NONET_L-01_P-001" (solid, remove dead copper, pour order 73): 12.954,113.411 14.986,113.411 16.637,111.76 16.637,109.22 17.399,109.22 17.399,107.823 16.764,107.188 14.224,107.188 14.224,109.22 14.224,109.347 14.732,109.347 14.986,109.601 14.986,110.998 12.954,110.998
no net on Bottom Layer "NONET_L-01_P-001" (solid, remove dead copper, pour order 72): 21.336,110.49 25.4,110.49 25.654,110.236 25.656,110.236 25.656,110.111 25.527,109.982 25.527,109.728 24.384,108.585 24.384,108.331 21.336,108.331
no net on Bottom Layer "NONET_L-01_P-001" (solid, remove dead copper, pour order 71): 21.209,107.569 24.384,107.569 25.527,106.426 27.305,106.426 27.813,105.918 27.686,105.791 21.209,105.791
no net on Bottom Layer "NONET_L-01_P-001" (solid, remove dead copper, pour order 70): 22.987,117.094 23.876,116.205 23.876,114.554 19.558,114.554 18.796,113.792 18.796,106.172 17.526,104.902 14.224,104.902 14.224,106.299 14.605,106.68 17.018,106.68 17.78,107.442 17.78,115.57 19.304,117.094
no net on Bottom Layer "NONET_L-01_P-001" (solid, remove dead copper, pour order 69): 23.749,113.538 20.701,113.538 19.304,112.141 19.304,99.695 21.209,99.695 22.86,98.044 26.416,98.044 26.416,101.727 22.479,101.727 20.701,103.505 20.701,110.49 21.336,111.125 23.749,111.125
no net on Bottom Layer "NONET_L-01_P-001" (solid, remove dead copper, pour order 68): 20.447,120.65 23.876,120.65 23.876,118.618 25.654,116.84 26.416,116.84 26.416,111.252 24.511,111.252 24.511,116.586 22.733,118.364 20.447,118.364
no net on Bottom Layer "NONET_L-01_P-001" (solid, remove dead copper, pour order 67): 5.588,113.284 8.001,113.284 9.271,114.554 9.271,116.205 11.303,118.237 14.986,118.237 17.907,121.158 26.162,121.158 28.956,118.364 28.956,110.744 27.559,109.347 25.654,109.347 25.654,107.061 27.813,107.061 29.845,109.093 29.845,119.888 27.305,122.428 12.573,122.428 7.239,117.094 5.588,117.094
no net on Bottom Layer "NONET_L-01_P-001" (solid, remove dead copper, pour order 66): 40.957,102.87 52.07,102.87 54.229,100.711 54.229,94.615 46.99,87.376 37.719,87.376 37.465,87.63 37.465,90.805 48.641,90.805 49.403,91.567 49.403,99.314 46.609,102.108 40.767,102.108
no net on Bottom Layer "NONET_L-01_P-001" (solid, remove dead copper, pour order 65): 51.689,108.458 51.689,111.76 50.165,113.284 33.655,113.284 32.639,113.284 32.639,123.19 30.607,125.222 10.287,125.222 2.54,117.475 2.54,102.743 2.54,96.774 11.938,87.376 36.83,87.376 36.83,92.075 35.052,93.853 29.718,93.853 29.718,90.424 29.464,90.17 16.637,90.17 9.779,97.028 9.779,101.981 18.288,101.981 18.288,104.521 11.684,104.521 8.255,107.95 5.08,107.95 5.08,117.221 11.049,123.19 27.813,123.19 30.607,120.396 30.607,105.918 35.433,105.918 36.322,105.029 38.354,105.029 38.354,110.871 38.989,111.506 45.085,111.506 48.133,108.458
no net on Bottom Layer "NONET_L-01_P-001" (solid, remove dead copper, pour order 64): 33.401,125.222 46.609,125.222 54.229,117.602 54.229,103.632 53.848,103.251 41.783,103.251 41.656,103.378 41.656,107.442 41.148,107.95 38.989,107.95 38.989,109.982 44.577,109.982 46.99,107.569 46.99,105.791 51.689,105.791 52.324,106.426 52.324,113.03 51.435,113.919 34.925,113.919 33.401,115.443
no net on Bottom Layer "NONET_L-01_P-001" (solid, remove dead copper, pour order 63): 38.862,107.315 41.021,107.315 41.021,102.108 33.528,102.108 32.893,102.743 32.893,105.156 35.433,105.156 36.195,104.394 38.862,104.394
no net on Bottom Layer "NONET_L-01_P-001" (solid, remove dead copper, pour order 62): 22.479,97.409 26.924,97.409 29.337,99.822 29.337,102.616 24.003,102.616 24.003,105.283 30.353,105.283 31.496,104.14 31.496,101.473 31.877,101.092 44.577,101.092 46.863,98.806 46.863,92.964 42.037,92.964 41.783,93.218 41.783,97.663 40.513,98.933 40.386,98.806 30.48,98.806 27.305,95.631 22.479,95.631
no net on Bottom Layer "NONET_L-01_P-001" (solid, remove dead copper, pour order 61): 13.843,99.568 15.621,99.568 17.272,99.568 21.209,95.631 21.209,94.869 27.686,94.869 28.702,95.885 37.973,95.885 38.989,94.869 38.989,91.313 39.751,90.551 39.751,90.043 37.973,90.043 37.465,90.551 37.465,93.853 36.83,94.488 29.21,94.488 29.21,92.202 27.94,90.932 19.685,90.932 16.383,94.234 13.843,94.234
no net on Bottom Layer "NONET_L-01_P-001" (solid, remove dead copper, pour order 60): 126.773,34.479 126.773,32.574 128.17,31.177 129.186,31.177 129.44,30.923 129.44,29.272 130.202,30.034 130.202,32.193 127.916,34.479
no net on Bottom Layer "NONET_L-01_P-001" (solid, remove dead copper, pour order 59): 107.85,26.097 107.85,22.414 112.676,22.414 114.454,24.192 114.454,28.129 114.708,28.383 117.375,28.383 117.375,30.669 117.248,30.796 113.819,30.796 112.549,29.526 112.549,27.113 111.533,26.097
no net on Bottom Layer "NONET_L-01_P-001" (solid, remove dead copper, pour order 58): 115.216,27.24 117.248,27.24 118.899,25.589 118.899,23.049 119.661,23.049 119.661,21.652 119.026,21.017 116.486,21.017 116.486,23.049 116.486,23.176 116.994,23.176 117.248,23.43 117.248,24.827 115.216,24.827
no net on Bottom Layer "NONET_L-01_P-001" (solid, remove dead copper, pour order 57): 123.598,24.319 127.662,24.319 127.916,24.065 127.918,24.065 127.918,23.94 127.789,23.811 127.789,23.557 126.646,22.414 126.646,22.16 123.598,22.16
no net on Bottom Layer "NONET_L-01_P-001" (solid, remove dead copper, pour order 56): 123.471,21.398 126.646,21.398 127.789,20.255 129.567,20.255 130.075,19.747 129.948,19.62 123.471,19.62
no net on Bottom Layer "NONET_L-01_P-001" (solid, remove dead copper, pour order 55): 125.249,30.923 126.138,30.034 126.138,28.383 121.82,28.383 121.058,27.621 121.058,20.001 119.788,18.731 116.486,18.731 116.486,20.128 116.867,20.509 119.28,20.509 120.042,21.271 120.042,29.399 121.566,30.923
no net on Bottom Layer "NONET_L-01_P-001" (solid, remove dead copper, pour order 54): 126.011,27.367 122.963,27.367 121.566,25.97 121.566,13.524 123.471,13.524 125.122,11.873 128.678,11.873 128.678,15.556 124.741,15.556 122.963,17.334 122.963,24.319 123.598,24.954 126.011,24.954
no net on Bottom Layer "NONET_L-01_P-001" (solid, remove dead copper, pour order 53): 122.709,34.479 126.138,34.479 126.138,32.447 127.916,30.669 128.678,30.669 128.678,25.081 126.773,25.081 126.773,30.415 124.995,32.193 122.709,32.193
no net on Bottom Layer "NONET_L-01_P-001" (solid, remove dead copper, pour order 52): 107.85,27.113 110.263,27.113 111.533,28.383 111.533,30.034 113.565,32.066 117.248,32.066 120.169,34.987 128.424,34.987 131.218,32.193 131.218,24.573 129.821,23.176 127.916,23.176 127.916,20.89 130.075,20.89 132.107,22.922 132.107,33.717 129.567,36.257 114.835,36.257 109.501,30.923 107.85,30.923
no net on Bottom Layer "NONET_L-01_P-001" (solid, remove dead copper, pour order 51): 143.219,16.699 154.332,16.699 156.491,14.54 156.491,8.444 149.252,1.205 139.981,1.205 139.727,1.459 139.727,4.634 150.903,4.634 151.665,5.396 151.665,13.143 148.871,15.937 143.029,15.937
no net on Bottom Layer "NONET_L-01_P-001" (solid, remove dead copper, pour order 50): 153.951,22.287 153.951,25.589 152.427,27.113 135.917,27.113 134.901,27.113 134.901,37.019 132.869,39.051 112.549,39.051 104.802,31.304 104.802,16.572 104.802,10.603 114.2,1.205 139.092,1.205 139.092,5.904 137.314,7.682 131.98,7.682 131.98,4.253 131.726,3.999 118.899,3.999 112.041,10.857 112.041,15.81 120.55,15.81 120.55,18.35 113.946,18.35 110.517,21.779 107.342,21.779 107.342,31.05 113.311,37.019 130.075,37.019 132.869,34.225 132.869,19.747 137.695,19.747 138.584,18.858 140.616,18.858 140.616,24.7 141.251,25.335 147.347,25.335 150.395,22.287
no net on Bottom Layer "NONET_L-01_P-001" (solid, remove dead copper, pour order 49): 135.663,39.051 148.871,39.051 156.491,31.431 156.491,17.461 156.11,17.08 144.045,17.08 143.918,17.207 143.918,21.271 143.41,21.779 141.251,21.779 141.251,23.811 146.839,23.811 149.252,21.398 149.252,19.62 153.951,19.62 154.586,20.255 154.586,26.859 153.697,27.748 137.187,27.748 135.663,29.272
no net on Bottom Layer "NONET_L-01_P-001" (solid, remove dead copper, pour order 48): 141.124,21.144 143.283,21.144 143.283,15.937 135.79,15.937 135.155,16.572 135.155,18.985 137.695,18.985 138.457,18.223 141.124,18.223
no net on Bottom Layer "NONET_L-01_P-001" (solid, remove dead copper, pour order 47): 124.741,11.238 129.186,11.238 131.599,13.651 131.599,16.445 126.265,16.445 126.265,19.112 132.615,19.112 133.758,17.969 133.758,15.302 134.139,14.921 146.839,14.921 149.125,12.635 149.125,6.793 144.299,6.793 144.045,7.047 144.045,11.492 142.775,12.762 142.648,12.635 132.742,12.635 129.567,9.46 124.741,9.46
no net on Bottom Layer "NONET_L-01_P-001" (solid, remove dead copper, pour order 46): 116.105,13.397 117.883,13.397 119.534,13.397 123.471,9.46 123.471,8.698 129.948,8.698 130.964,9.714 140.235,9.714 141.251,8.698 141.251,5.142 142.013,4.38 142.013,3.872 140.235,3.872 139.727,4.38 139.727,7.682 139.092,8.317 131.472,8.317 131.472,6.031 130.202,4.761 121.947,4.761 118.645,8.063 116.105,8.063
NetLED1_1 on Bottom Layer "NONET_L-01_P-001" (solid, remove dead copper, pour order 45): 23.241,34.417 23.241,32.512 24.638,31.115 25.654,31.115 25.908,30.861 25.908,29.21 26.67,29.972 26.67,32.131 24.384,34.417
CTRL on Bottom Layer "NONET_L-01_P-001" (solid, remove dead copper, pour order 44): 4.318,26.035 4.318,22.352 9.144,22.352 10.922,24.13 10.922,28.067 11.176,28.321 13.843,28.321 13.843,30.607 13.716,30.734 10.287,30.734 9.017,29.464 9.017,27.051 8.001,26.035
NetQ2_3 on Bottom Layer "NONET_L-01_P-001" (solid, remove dead copper, pour order 43): 11.684,27.178 13.716,27.178 15.367,25.527 15.367,22.987 16.129,22.987 16.129,21.59 15.494,20.955 12.954,20.955 12.954,22.987 12.954,23.114 13.462,23.114 13.716,23.368 13.716,24.765 11.684,24.765
NetLED1_1 on Bottom Layer "NONET_L-01_P-001" (solid, remove dead copper, pour order 42): 20.066,24.257 24.13,24.257 24.384,24.003 24.386,24.003 24.386,23.878 24.257,23.749 24.257,23.495 23.114,22.352 23.114,22.098 20.066,22.098
GND on Bottom Layer "NONET_L-01_P-001" (solid, remove dead copper, pour order 41): 19.939,21.336 23.114,21.336 24.257,20.193 26.035,20.193 26.543,19.685 26.416,19.558 19.939,19.558
NetQ2_2 on Bottom Layer "NONET_L-01_P-001" (solid, remove dead copper, pour order 40): 21.717,30.861 22.606,29.972 22.606,28.321 18.288,28.321 17.526,27.559 17.526,19.939 16.256,18.669 12.954,18.669 12.954,20.066 13.335,20.447 15.748,20.447 16.51,21.209 16.51,29.337 18.034,30.861
NetQ1_1 on Bottom Layer "NONET_L-01_P-001" (solid, remove dead copper, pour order 39): 22.479,27.305 19.431,27.305 18.034,25.908 18.034,13.462 19.939,13.462 21.59,11.811 25.146,11.811 25.146,15.494 21.209,15.494 19.431,17.272 19.431,24.257 20.066,24.892 22.479,24.892
NetR1_2 on Bottom Layer "NONET_L-01_P-001" (solid, remove dead copper, pour order 38): 19.177,34.417 22.606,34.417 22.606,32.385 24.384,30.607 25.146,30.607 25.146,25.019 23.241,25.019 23.241,30.353 21.463,32.131 19.177,32.131
V_REF on Bottom Layer "NONET_L-01_P-001" (solid, remove dead copper, pour order 37): 4.318,27.051 6.731,27.051 8.001,28.321 8.001,29.972 10.033,32.004 13.716,32.004 16.637,34.925 24.892,34.925 27.686,32.131 27.686,24.511 26.289,23.114 24.384,23.114 24.384,20.828 26.543,20.828 28.575,22.86 28.575,33.655 26.035,36.195 11.303,36.195 5.969,30.861 4.318,30.861
NetC1_2 on Bottom Layer "NONET_L-01_P-001" (solid, remove dead copper, pour order 9): 39.688,16.637 50.8,16.637 52.959,14.478 52.959,8.382 45.72,1.143 36.449,1.143 36.195,1.397 36.195,4.572 47.371,4.572 48.133,5.334 48.133,13.081 45.339,15.875 39.497,15.875
GND on Bottom Layer "NONET_L-01_P-001" (solid, remove dead copper, pour order 8): 50.419,22.225 50.419,25.527 48.895,27.051 32.385,27.051 31.369,27.051 31.369,36.957 29.337,38.989 9.017,38.989 1.27,31.242 1.27,16.51 1.27,10.541 10.668,1.143 35.56,1.143 35.56,5.842 33.782,7.62 28.448,7.62 28.448,4.191 28.194,3.937 15.367,3.937 8.509,10.795 8.509,15.748 17.018,15.748 17.018,18.288 10.414,18.288 6.985,21.717 3.81,21.717 3.81,30.988 9.779,36.957 26.543,36.957 29.337,34.163 29.337,19.685 34.163,19.685 35.052,18.796 37.084,18.796 37.084,24.638 37.719,25.273 43.815,25.273 46.863,22.225
VOUT on Bottom Layer "NONET_L-01_P-001" (solid, remove dead copper, pour order 4): 32.131,38.989 45.339,38.989 52.959,31.369 52.959,17.399 52.578,17.018 40.513,17.018 40.386,17.145 40.386,21.209 39.878,21.717 37.719,21.717 37.719,23.749 43.307,23.749 45.72,21.336 45.72,19.558 50.419,19.558 51.054,20.193 51.054,26.797 50.165,27.686 33.655,27.686 32.131,29.21
NetC1_2 on Bottom Layer "NONET_L-01_P-001" (solid, remove dead copper, pour order 3): 37.592,21.082 39.751,21.082 39.751,15.875 32.258,15.875 31.623,16.51 31.623,18.923 34.163,18.923 34.925,18.161 37.592,18.161
NetD1_1 on Bottom Layer "NONET_L-01_P-001" (solid, remove dead copper, pour order 2): 21.209,11.176 25.654,11.176 28.067,13.589 28.067,16.383 22.733,16.383 22.733,19.05 29.083,19.05 30.226,17.907 30.226,15.24 30.607,14.859 43.307,14.859 45.593,12.573 45.593,6.731 40.767,6.731 40.513,6.985 40.513,11.43 39.243,12.7 39.116,12.573 29.21,12.573 26.035,9.398 21.209,9.398
NetC1_2 on Bottom Layer "NONET_L-01_P-001" (solid, remove dead copper, pour order 0): 12.573,13.335 14.351,13.335 16.002,13.335 19.939,9.398 19.939,8.636 26.416,8.636 27.432,9.652 36.703,9.652 37.719,8.636 37.719,5.08 38.481,4.318 38.481,3.81 36.703,3.81 36.195,4.318 36.195,7.62 35.56,8.255 27.94,8.255 27.94,5.969 26.67,4.699 18.415,4.699 15.113,8.001 12.573,8.001

## Keep-outs
Keep-Out Layer:
  lines w0.3: 0,0 55,0 55,40 0,40 0,0 ; 1.27,86.233 1.27,126.233 56.27,126.233 56.27,86.233 1.27,86.233 ; 103.532,0.062 103.532,40.062 158.532,40.062 158.532,0.062 103.532,0.062 ; 104.802,86.295 159.802,86.295 159.802,126.295 104.802,126.295 104.802,86.295

## Silkscreen, mask and mechanical layers (free items; w line width, h text height)
Top Overlay:
  text "VREF" at 107.258,113.411 h2 r90
  text "VREF" at 3.726,113.349 h2 r90
  text "VOUT" at 158.058,113.057 h2 r90
  text "VOUT" at 54.526,112.995 h2 r90
  text "CRTL" at 107.258,108.585 h2 r90
  text "CRTL" at 3.726,108.523 h2 r90
  text "GND" at 158.185,108.274 h2 r90
  text "GND" at 54.653,108.212 h2 r90
  text "GND" at 107.385,103.52 h2 r90
  text "GND" at 3.853,103.459 h2 r90
  text "VIN" at 104.64,91.077 h2
  text "VIN" at 1.108,91.016 h2
  text "VREF" at 105.988,27.178 h2 r90
  text "VREF" at 2.456,27.116 h2 r90
  text "VOUT" at 156.788,26.824 h2 r90
  text "VOUT" at 53.256,26.762 h2 r90
  text "CRTL" at 105.988,22.352 h2 r90
  text "CRTL" at 2.456,22.29 h2 r90
  text "GND" at 156.915,22.041 h2 r90
  text "GND" at 53.383,21.979 h2 r90
  text "GND" at 106.115,17.287 h2 r90
  text "GND" at 2.583,17.226 h2 r90
  text "VIN" at 103.37,4.844 h2
  text "VIN" at -0.162,4.783 h2

## Text inside footprints (layer, text, board x,y; h text height)
Q1: Mechanical 13 "3" at 22.606,8.382 h1.27 r270; Mechanical 13 "2" at 22.606,10.922 h1.27 r270; Mechanical 13 "1" at 22.606,13.462 h1.27 r270
Q1_1: Mechanical 13 "1" at 126.138,13.524 h1.27 r270; Mechanical 13 "2" at 126.138,10.984 h1.27 r270; Mechanical 13 "3" at 126.138,8.444 h1.27 r270
Q1_1_1: Mechanical 13 "1" at 127.408,99.757 h1.27 r270; Mechanical 13 "2" at 127.408,97.217 h1.27 r270; Mechanical 13 "3" at 127.408,94.677 h1.27 r270
Q1_2: Mechanical 13 "1" at 23.876,99.695 h1.27 r270; Mechanical 13 "2" at 23.876,97.155 h1.27 r270; Mechanical 13 "3" at 23.876,94.615 h1.27 r270